# Altium PCB Power-Management-PCB.PcbDoc
Units mm, origin at the board's own origin, x right, y up, seen from the top; angles counter-clockwise.
Board outline 65 x 26 mm, 2 copper layers (Top Layer, Bottom Layer); 23 components, 6 nets, 53 pads, 128 vias.
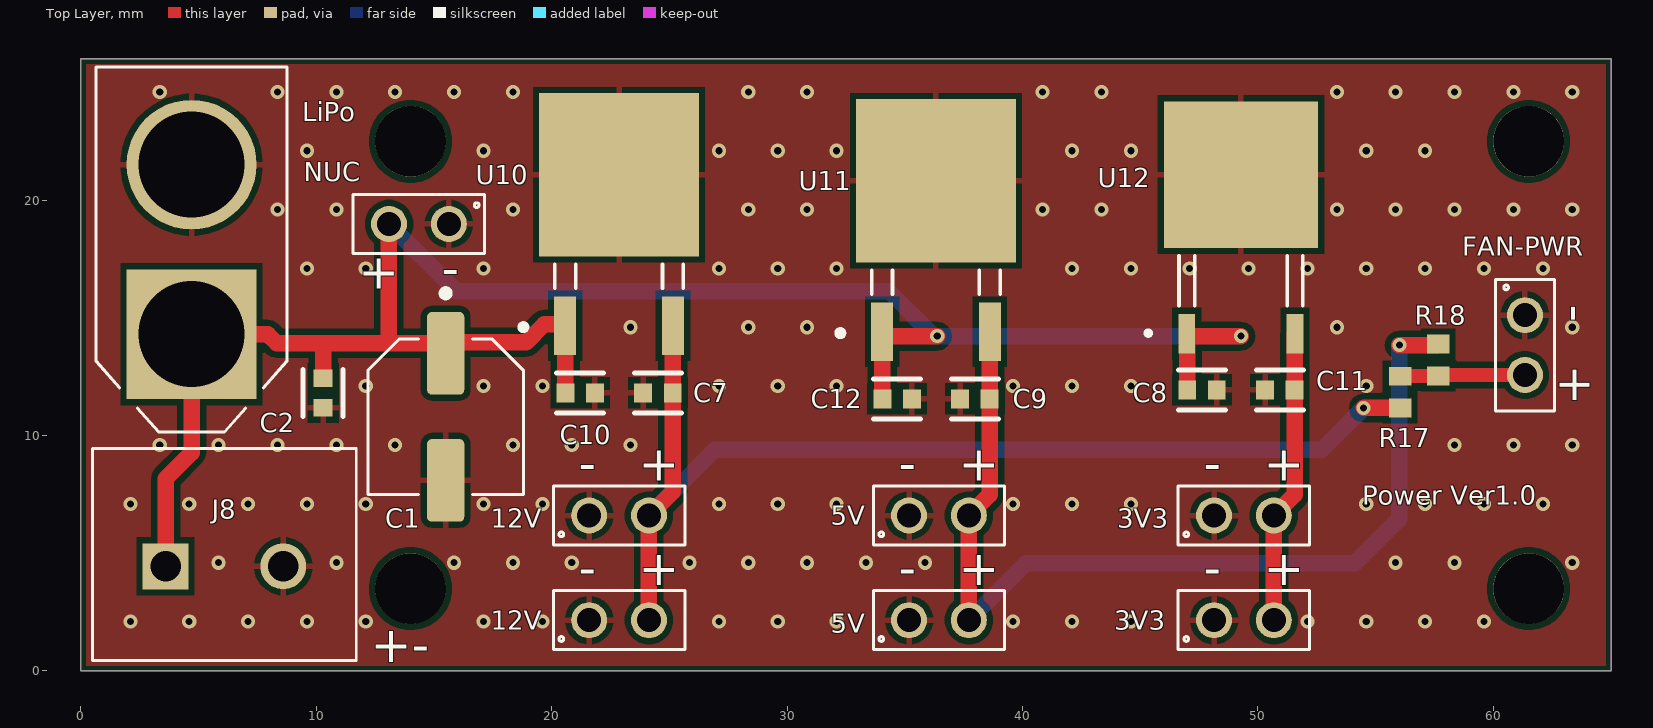
[diagram p0: Top Layer view]
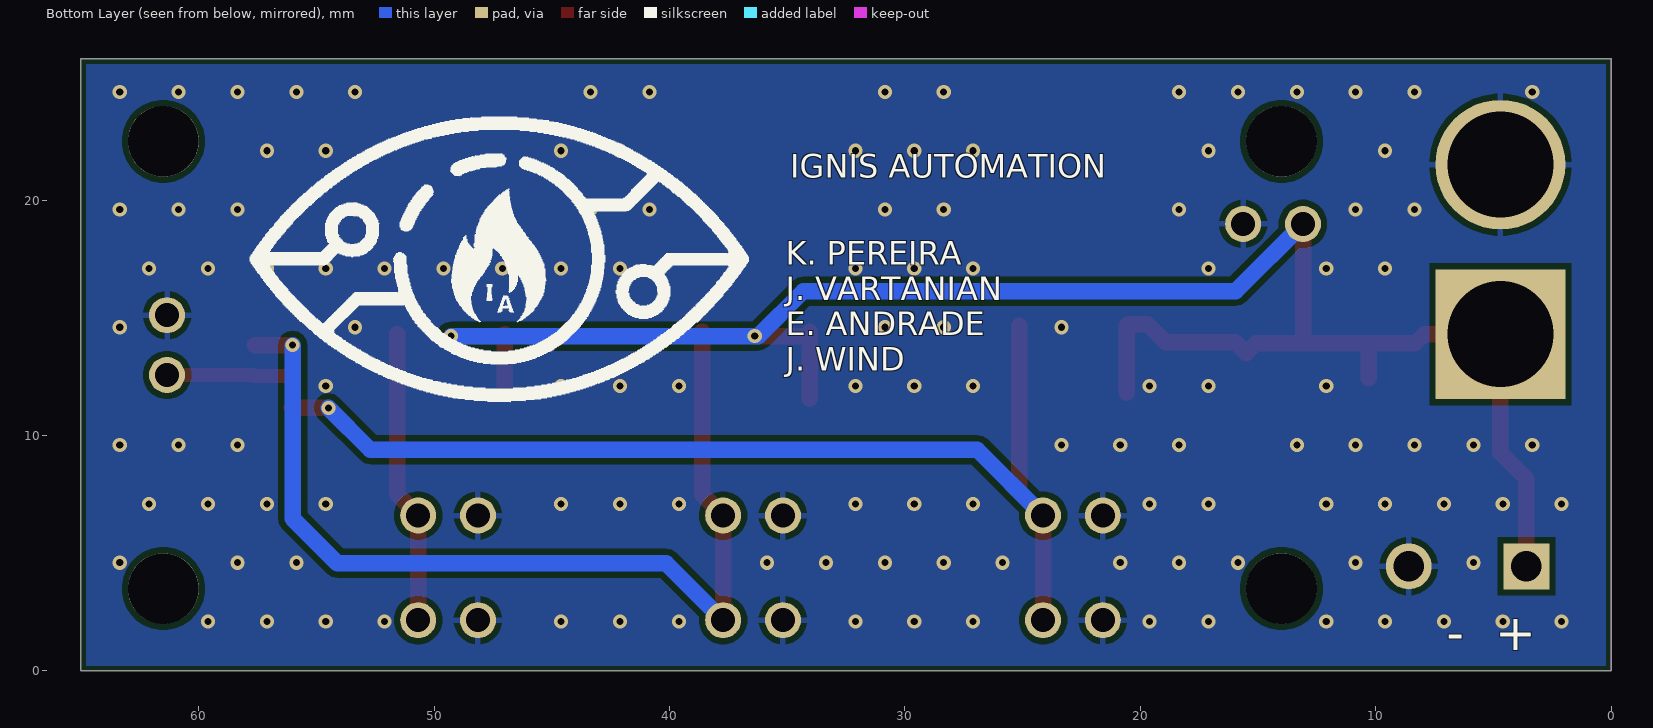
[diagram p1: Bottom Layer view, seen from below]
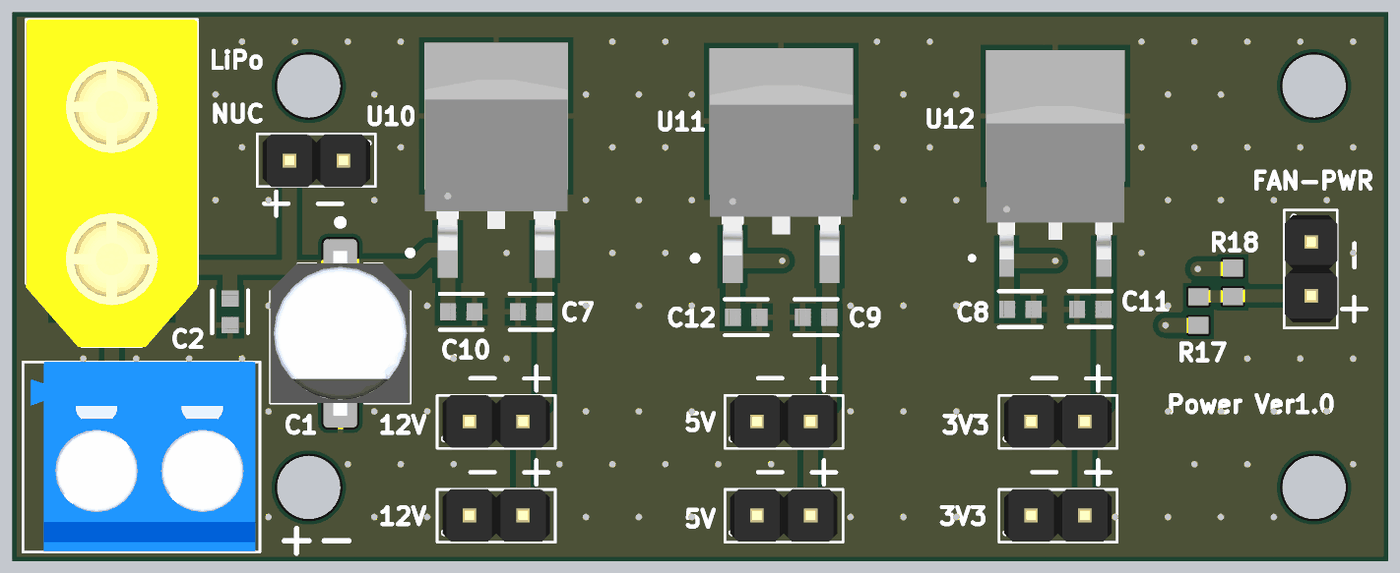
[diagram p2: 3D render of the assembled board from above, using the file's embedded part models]

## Layer stack, top to bottom
Top Solder: solder mask 0.0102, Solder Resist, Dk 3.5
Top Layer: signal copper 0.0356
Dielectric 1: dielectric 0.32, FR-4, Dk 4.8
Bottom Layer: signal copper 0.0356
Bottom Solder: solder mask 0.0102, Solder Resist, Dk 3.5

## Board outline
0,0 0,26 65,26 65,0

## Design rules (kind name [scope] priority, off if disabled: settings)
Clearance Clearance_2 [InNamedPolygon('NONET_L-01_P-001') Or InNamedPolygon('NONET_L-01_P-001') vs OnLayer('Keep-Out Layer')] p1: gap=0.2 ignorepadtopadclearanceinfootprint=FALSE
Clearance Clearance_1 [InNamedPolygon('NONET_L-01_P-001') Or InNamedPolygon('NONET_L-01_P-001') vs OnLayer('Keep-Out Layer')] p2: gap=0.254 ignorepadtopadclearanceinfootprint=FALSE except(0: Arc-Hole Track-Hole SMDPad-Hole THPad-Hole Via-Hole Fill-Hole Poly-Hole Region-Hole Text-Hole)
Clearance [All] p3: gap=0.254 ignorepadtopadclearanceinfootprint=FALSE except(0: Arc-Hole Track-Hole SMDPad-Hole THPad-Hole Via-Hole Fill-Hole Poly-Hole Region-Hole Text-Hole)
HoleSize Via [IsVia] p1: absolutevalues=TRUE maxlimit=6.3 minlimit=0.3 maxpercent=80.000 minpercent=20.000
HoleSize [All] p2: absolutevalues=TRUE maxlimit=6.3 minlimit=0.2 maxpercent=80.000 minpercent=20.000
HoleToHoleClearance [All] p1: gap=0.5 allowstackedmicrovias=TRUE
MinimumAnnularRing [All] p1: minimumring=0.13
MinimumSolderMaskSliver [All] p1: minsoldermaskwidth=0.2
PolygonConnect [All] p1: connectstyle=Relief reliefconductorwidth=0.254 reliefentries=4 polygonreliefangle="90 Angle" airgapwidth=0.254
RoutingVias [All] p1: holewidth=0.711 width=1.27 viastyle="Through Hole" minholewidth=0.711 minwidth=1.27 maxholewidth=0.711 maxwidth=1.27
SilkToSolderMaskClearance [IsPad] p1: minsilkscreentomaskgap=0.15 clearancetoexposedcopper=TRUE
SolderMaskExpansion [All] p1: expansion=0.102 istentingtop=FALSE
Width [All] p1: maxlimit=10 minlimit=0.254 preferedwidth=0.381
26 further rules are at their usual default settings.

## Components (designator, comment, footprint, x,y, rotation, side; value= is the part's Value field where it differs from the comment)
3V3 "3V3-2" 61300711821 55.753,2.159 r0 top (schematic designator J7)
3V3 "3V3-1" 61300711821 55.753,6.604 r0 top (schematic designator J6)
5V "5V-2" 61300711821 42.799,2.159 r0 top (schematic designator J5)
5V "5V-1" 61300711821 42.799,6.604 r0 top (schematic designator J3)
12V "12V-2" 61300711821 29.21,2.159 r0 top (schematic designator J2)
12V "12V-1" 61300711821 29.21,6.604 r0 top (schematic designator J1)
C1 "100uF" CAPAE660X800N_EEE-FPV101XAP 15.494,10.795 r270 top
C2 "0.1uf" FP-CL10-IPC_C 10.287,11.811 r270 top
C7 "0.1uF" FP-CL10-IPC_C 24.511,11.811 r0 top
C8 "0.33uF" FP-CL10-IPC_C 47.625,11.938 r180 top
C9 "0.1uF" FP-CL10-IPC_C 37.973,11.557 r0 top
C10 "0.33uF" FP-CL10-IPC_C 21.209,11.811 r180 top
C11 "0.1uF" FP-CL10-IPC_C 50.927,11.938 r0 top
C12 "0.33uF" FP-CL10-IPC_C 34.671,11.557 r180 top
FAN-PWR "Fan-PWR" 61300711821 61.341,7.493 r270 top (schematic designator J4)
J8 "Screw Terminal" OST_OSTTA020161 6.096,4.445 r0 top
LiPo "XT60-M" AMASS_XT60-M 4.699,17.907 r90 top (schematic designator J13)
NUC "Intel NUC" 61300711821 8.01,18.989 r180 top (schematic designator J15)
R17 "0R" RESC1608X55X30NL15T15 56.038,11.847 r90 top
R18 "0R" RESC1608X55X30NL15T15 57.658,13.208 r90 top
U10 "MC7812BDTRKG" DPAK-3_ONS 22.86,21.082 r0 top
U11 "MC7805CDTRKG" DPAK-3_ONS 36.322,20.828 r0 top
U12 "BA033CC0FP-E2" TO252-3_ROM 49.276,21.082 r0 top

## Footprints (in the part's own frame and the unit in brackets; to place one, negate y for a bottom-side part, rotate by r counter-clockwise, add the part's x,y. Pads: shape width x height; smd on the part's side, far side on the other; paste and mask are expansions set on the pad)
61300711821 [mm]
  round 1.53 hole 1.02: 1(-7.62,0) 2(-5.08,0)
  silkscreen extent -9.14,-1.25 -3.56,1.25, body extent -8.89,-1.23 -3.81,1.27, height 10.54
AMASS_XT60-M [mm]
  rect 5.516x5.516 hole 4.5: 1(-3.6,0)
  round 5.516 hole 4.5: 2(3.6,0)
  silkscreen extent -7.75,-4.05 7.75,4.05, body extent -7.75,-4.05 7.75,4.05, height 16
CAPAE660X800N_EEE-FPV101XAP [mm]
  rrect25% 3.51x1.58 smd: 1(-2.7,0) 2(2.7,0)
  silkscreen extent -5.4,-3.3 3.3,3.3, body extent -3.9,-3.3 3.9,3.3, height 8
DPAK-3_ONS [mil]
  rect 36.97x97.56 smd paste+0 mask+0: 1(-90.16,-252.5) 3(90.16,-252.5)
  rect 267x273 smd paste+0 mask+0: 2(0,0)
  silkscreen extent -165,-260 108,-150, body extent -133,-250 133,67, height 67
FP-CL10-IPC_C [mm]
  rect 0.758x0.812 smd paste+0 mask+0: 1(-0.627,0) 2(0.627,0)
  silkscreen extent -1.01,-0.85 1.01,0.85, body extent -1.11,-0.55 1.11,0.55, height 0.25
OST_OSTTA020161 [mm]
  rect 1.95x1.95 hole 1.3: 1(-2.5,0)
  round 1.95 hole 1.3: 2(2.5,0)
  silkscreen extent -5.6,-4 5.6,5, body extent -5.22,-3.99 5.38,5.01, height 12.6
RESC1608X55X30NL15T15 [mm] "Chip Resistor, 2-Leads, Body 1.60x0.80mm, IPC Medium Density"
  rect 0.8x0.95 smd: 1(-0.675,0) 2(0.675,0)
  body extent -0.87,-0.48 0.87,0.48, height 0.55
TO252-3_ROM [mil]
  rect 27.97x66.56 smd paste+0 mask+0: 1(-90.55,-266) 3(90.55,-266)
  rect 258x245 smd paste+0 mask+0: 2(0,0)
  silkscreen extent -159,-269 104,-136, body extent -128,-268 128,19, height 98

## Part data
3V3 3V3 5V 5V 12V 12V FAN-PWR NUC: library part 61300711821, "2 Pin"
C1: library part EEE-FPV101XAP, "100ÂµF 35V Aluminum Electrolytic Capacitors Radial, Can - SMD 160 mohm @ 100kHz 2000 Hrs @ 105Â°C", Package="Radial Panasonic", Availability=Unavailable, MF=Panasonic, MP=EEE-FPV101XAP, Price=None, SnapEDA_Link=https://www.snapeda.com/parts/EEE-FPV101XAP/Panasonic/view-part/2297685/?ref=snap
C2 C7 C8 C9 C10 C11 C12: library part CMP-13271-003248-1, "Cap Ceramic 10uF 10V X5R ±20% Pad SMD 0603 +85°C T/R", Capacitance=10uF, Case Code (Imperial)=0603, Case Code (Metric)=1608, Dielectric=X5R, Max Operating Temperature=85°C, Min Operating Temperature=-55°C, Package Quantity=1, Tolerance=20%, Voltage Rating=10V, Case/Package=0603, Contact Plating=Tin, Depth=0.8mm, Height=0.8mm, Lead Free="Lead Free", Length=1.6mm, Mount="Surface Mount", Packaging="Tape and Reel", Radiation Hardening=No, Thickness=0.035inch, Voltage Rating (DC)=10V, Width=0.031inch
J8: library part OSTTA020161, "2 Position Wire to Board Terminal Block Horizontal with Board 0.197 _5.00mm_ Through Hole"
LiPo: "XT60"
R17 R18: library part CMP-2000-00180-1, Manufacturer=Panasonic, Part Number=ERJ-3EKF1001V
U10 U11 U12: "No Description Available"
  U12: Built_By=EMA_Molly, Copyright="Copyright (C) 2018 Accelerated Designs. All rights reserved", Manufacturer_Part_Number=BA033CC0FP-E2, RefDes=RefDes, SourceLibrary=ROHM_2019-10-21, Type=DEV, Vendor="ROHM Semiconductor"

## Free pads (board coordinates)
  round 3 hole 3 unplated: ""(14,3.5) ""(14,22.5) ""(61.5,3.5) ""(61.5,22.5)

## Via types
v1: diameter 0.6, hole 0.3, Top Layer to Bottom Layer, tented both sides, 128 vias

## Nets (pads, with @x,y where several pads share a name; then routed paths per layer and width w, separated by ;. In a path a pad name is that pad's centre, name@x,y a point inside that pad or via, vN(x,y) a via of type N, cw(c..) or ccw(c..) an arc to the next point about the centre after c; other vN are vias at no path point)
3V3: 3V3.2 C11.2 U12.3 | length 12.5
  Top Layer w0.254: C11.2 C11.2@51.565,11.949 ; U12.3@51.565,14.315 U12.3
  Top Layer w0.7: 3V3.2@50.673,2.159 50.673,6.604 51.554,7.485 C11.2 ; C11.2@51.565,11.949 U12.3@51.565,14.315
5V: 5V.2 C9.2 R18.2 U11.3 | length 41.7
  Top Layer w0.254: U11.3@38.6,14.402 U11.3 ; R18.2@57.618,13.843 R18.2
  Top Layer w0.7: 5V.2@37.719,2.159 37.719,6.604 38.6,7.485 C9.2 U11.3@38.6,14.402 ; v1(56.007,13.843) R18.2@57.618,13.843
  Bottom Layer w0.7: 5V.2@37.719,2.159 40.132,4.572 54.102,4.572 56.007,6.477 v1(56.007,13.843)
12V: 12V.2 C7.2 R17.1 U10.3 | length 46.7
  Top Layer w0.254: C7.2 C7.2@25.15,11.823 ; v1(54.483,11.176) v1@54.487,11.172
  Top Layer w0.7: 12V.2@24.13,2.159 24.13,6.604 25.138,7.612 C7.2 ; C7.2@25.15,11.823 U10.3 ; v1@54.487,11.172 R17.1
  Bottom Layer w0.7: 12V.2@24.13,6.604 26.924,9.398 52.705,9.398 v1(54.483,11.176)
BAT: C1.1 C2.1 C8.2 C10.2 C12.2 J8.1 LiPo.1 NUC.2 U10.1 U11.1 U12.1 | length 84.9
  Top Layer w0.254: U11.1 34.044,14.402 U11.1@34.222,14.224 ; v1@36.373,14.224 v1(36.375,14.227) ; U12.1 46.987,14.315 U12.1@47.078,14.224 ; C8.2@46.987,11.949 C8.2
  Top Layer w0.7: J8.1 3.596,8.168 4.699,9.271 LiPo.1 7.93,14.307 8.318,13.919 10.287,13.919 ; C2.1 10.287,13.919 ; NUC.2 13.09,18.805 13.081,18.796 13.081,13.919 ; C10.2 20.582,14.656 U10.1 20.506,14.732 19.685,14.732 18.923,13.97 15.969,13.97 C1.1 15.07,13.919 13.081,13.919 ; C12.2 U11.1@34.044,14.402 ; U11.1@34.222,14.224 v1@36.373,14.224 ; C8.2@46.987,11.949 U12.1@46.987,14.315 ; U12.1@47.078,14.224 v1(49.276,14.224) ; 10.287,13.919 13.081,13.919
  Bottom Layer w0.7: NUC.2@13.249,19.148 NUC.2 15.951,16.129 16.129,16.129 34.319,16.129 36.221,14.227 v1(36.375,14.227) 36.378,14.224 v1(49.276,14.224)
GND: 3V3.1 5V.1 12V.1 C1.2 C2.2 C7.1 C8.1 C9.1 C10.1 C11.1 C12.1 FAN-PWR.1 J8.2 LiPo.2 NUC.1 U10.2 U11.2 U12.2
  other v1: 2.1,2.1 4.6,2.1 7.1,2.1 9.6,2.1 12.1,2.1 17.1,2.1 19.6,2.1 27.1,2.1 29.6,2.1 32.1,2.1 39.6,2.1 42.1,2.1 44.6,2.1 52.1,2.1 54.6,2.1 57.1,2.1 59.6,2.1 5.85,4.6 10.85,4.6 15.85,4.6 18.35,4.6 20.85,4.6 25.85,4.6 28.35,4.6 30.85,4.6 33.35,4.6 35.85,4.6 55.85,4.6 58.35,4.6 63.35,4.6 2.1,7.1 4.6,7.1 7.1,7.1 9.6,7.1 12.1,7.1 17.1,7.1 19.6,7.1 27.1,7.1 29.6,7.1 32.1,7.1 39.6,7.1 42.1,7.1 44.6,7.1 54.6,7.1 57.1,7.1 59.6,7.1 62.1,7.1 3.35,9.6 5.85,9.6 8.35,9.6 10.85,9.6 13.35,9.6 18.35,9.6 20.85,9.6 23.35,9.6 58.35,9.6 60.85,9.6 63.35,9.6 12.1,12.1 17.1,12.1 19.6,12.1 27.1,12.1 29.6,12.1 32.1,12.1 39.6,12.1 42.1,12.1 44.6,12.1 54.6,12.1 23.35,14.6 28.35,14.6 30.85,14.6 53.35,14.6 63.35,14.6 9.6,17.1 12.1,17.1 17.1,17.1 27.1,17.1 29.6,17.1 32.1,17.1 42.1,17.1 44.6,17.1 47.1,17.1 49.6,17.1 52.1,17.1 54.6,17.1 57.1,17.1 59.6,17.1 62.1,17.1 8.35,19.6 10.85,19.6 18.35,19.6 28.35,19.6 30.85,19.6 40.85,19.6 43.35,19.6 53.35,19.6 55.85,19.6 58.35,19.6 60.85,19.6 63.35,19.6 9.6,22.1 17.1,22.1 27.1,22.1 29.6,22.1 32.1,22.1 42.1,22.1 44.6,22.1 54.6,22.1 57.1,22.1 3.35,24.6 8.35,24.6 10.85,24.6 13.35,24.6 15.85,24.6 18.35,24.6 28.35,24.6 30.85,24.6 40.85,24.6 43.35,24.6 53.35,24.6 55.85,24.6 58.35,24.6 60.85,24.6 63.35,24.6
NetJ4_2: FAN-PWR.2 R17.2 R18.1 | length 5.3
  Top Layer w0.6: R17.2 56.049,12.533 R18.1 57.698,12.573 FAN-PWR.2

## Polygon pours and split planes (outlines as drawn)
GND on Top Layer "NONET_L-01_P-001" (solid, pour order 0): 65,26 65,0 0,0 0,26
GND on Bottom Layer "NONET_L-01_P-001" (solid, pour order 1): 0,26 65,26 65,0 0,0

## Keep-outs
Keep-Out Layer:
  the board outline again, w0.025

## Silkscreen, mask and mechanical layers (free items; w line width, h text height)
Top Overlay:
  text "Power Ver1.0" at 54.429,7.058 h0.8
  text "+-" at 12.319,0.381 h1.52
Bottom Overlay:
  drawing of 6 lines, arcs and shapes, not listed
  text "IGNIS AUTOMATION" at 34.858,20.957 h1
  text "K. PEREIRA / J. VARTANIAN / E. ANDRADE / J. WIND" at 35.058,12.757 h1
  text "+  -" at 3.175,0.889 h1.52
Mechanical 1:
  the board outline again, w0.025

## Text inside footprints (layer, text, board x,y; h text height)
3V3: Top Overlay "+" at 50.238,8.078 h1.5; Top Overlay "-" at 47.698,8.086 h1.5
3V3: Top Overlay "+" at 50.238,3.633 h1.5; Top Overlay "-" at 47.698,3.641 h1.5
5V: Top Overlay "+" at 37.284,8.078 h1.5; Top Overlay "-" at 34.744,8.086 h1.5
5V: Top Overlay "+" at 37.284,3.633 h1.5; Top Overlay "-" at 34.744,3.641 h1.5
12V: Top Overlay "+" at 23.695,8.078 h1.5; Top Overlay "-" at 21.155,8.086 h1.5
12V: Top Overlay "+" at 23.695,3.633 h1.5; Top Overlay "-" at 21.155,3.641 h1.5
FAN-PWR: Top Overlay "+" at 62.815,13.008 h1.5 r270; Top Overlay "-" at 62.823,15.548 h1.5 r270
NUC: Top Overlay "+" at 13.525,17.515 h1.5 r180; Top Overlay "-" at 16.065,17.507 h1.5 r180
U10: Mechanical 13 "*" at 20.252,17.59 h1.27
U11: Mechanical 13 "*" at 33.714,17.335 h1.27
U12: Mechanical 13 "*" at 46.658,17.945 h1.27